# EAGLE board PCB v2 (EAGLE 9.7.0)
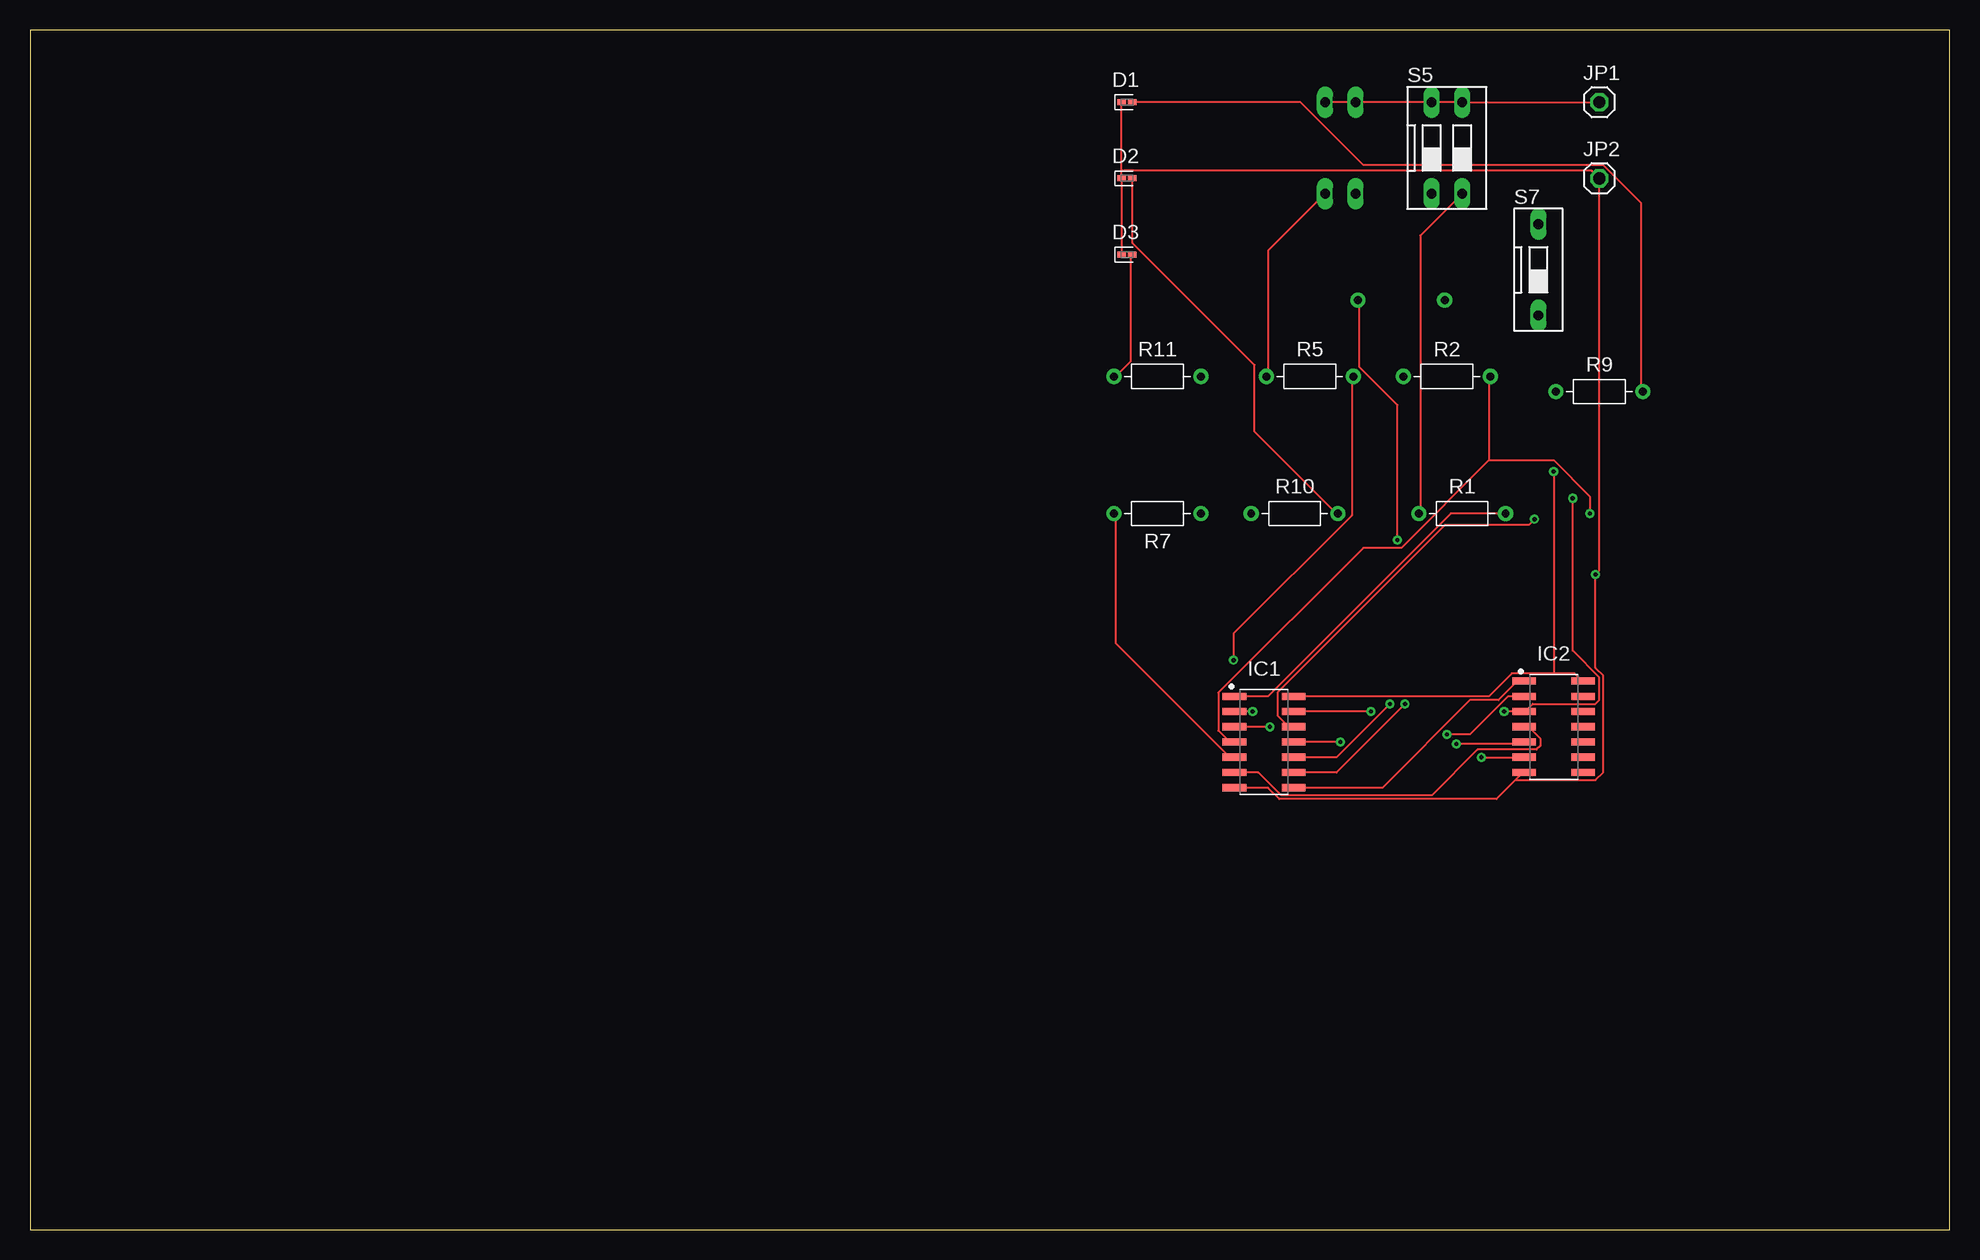
[diagram p0: board, top side]
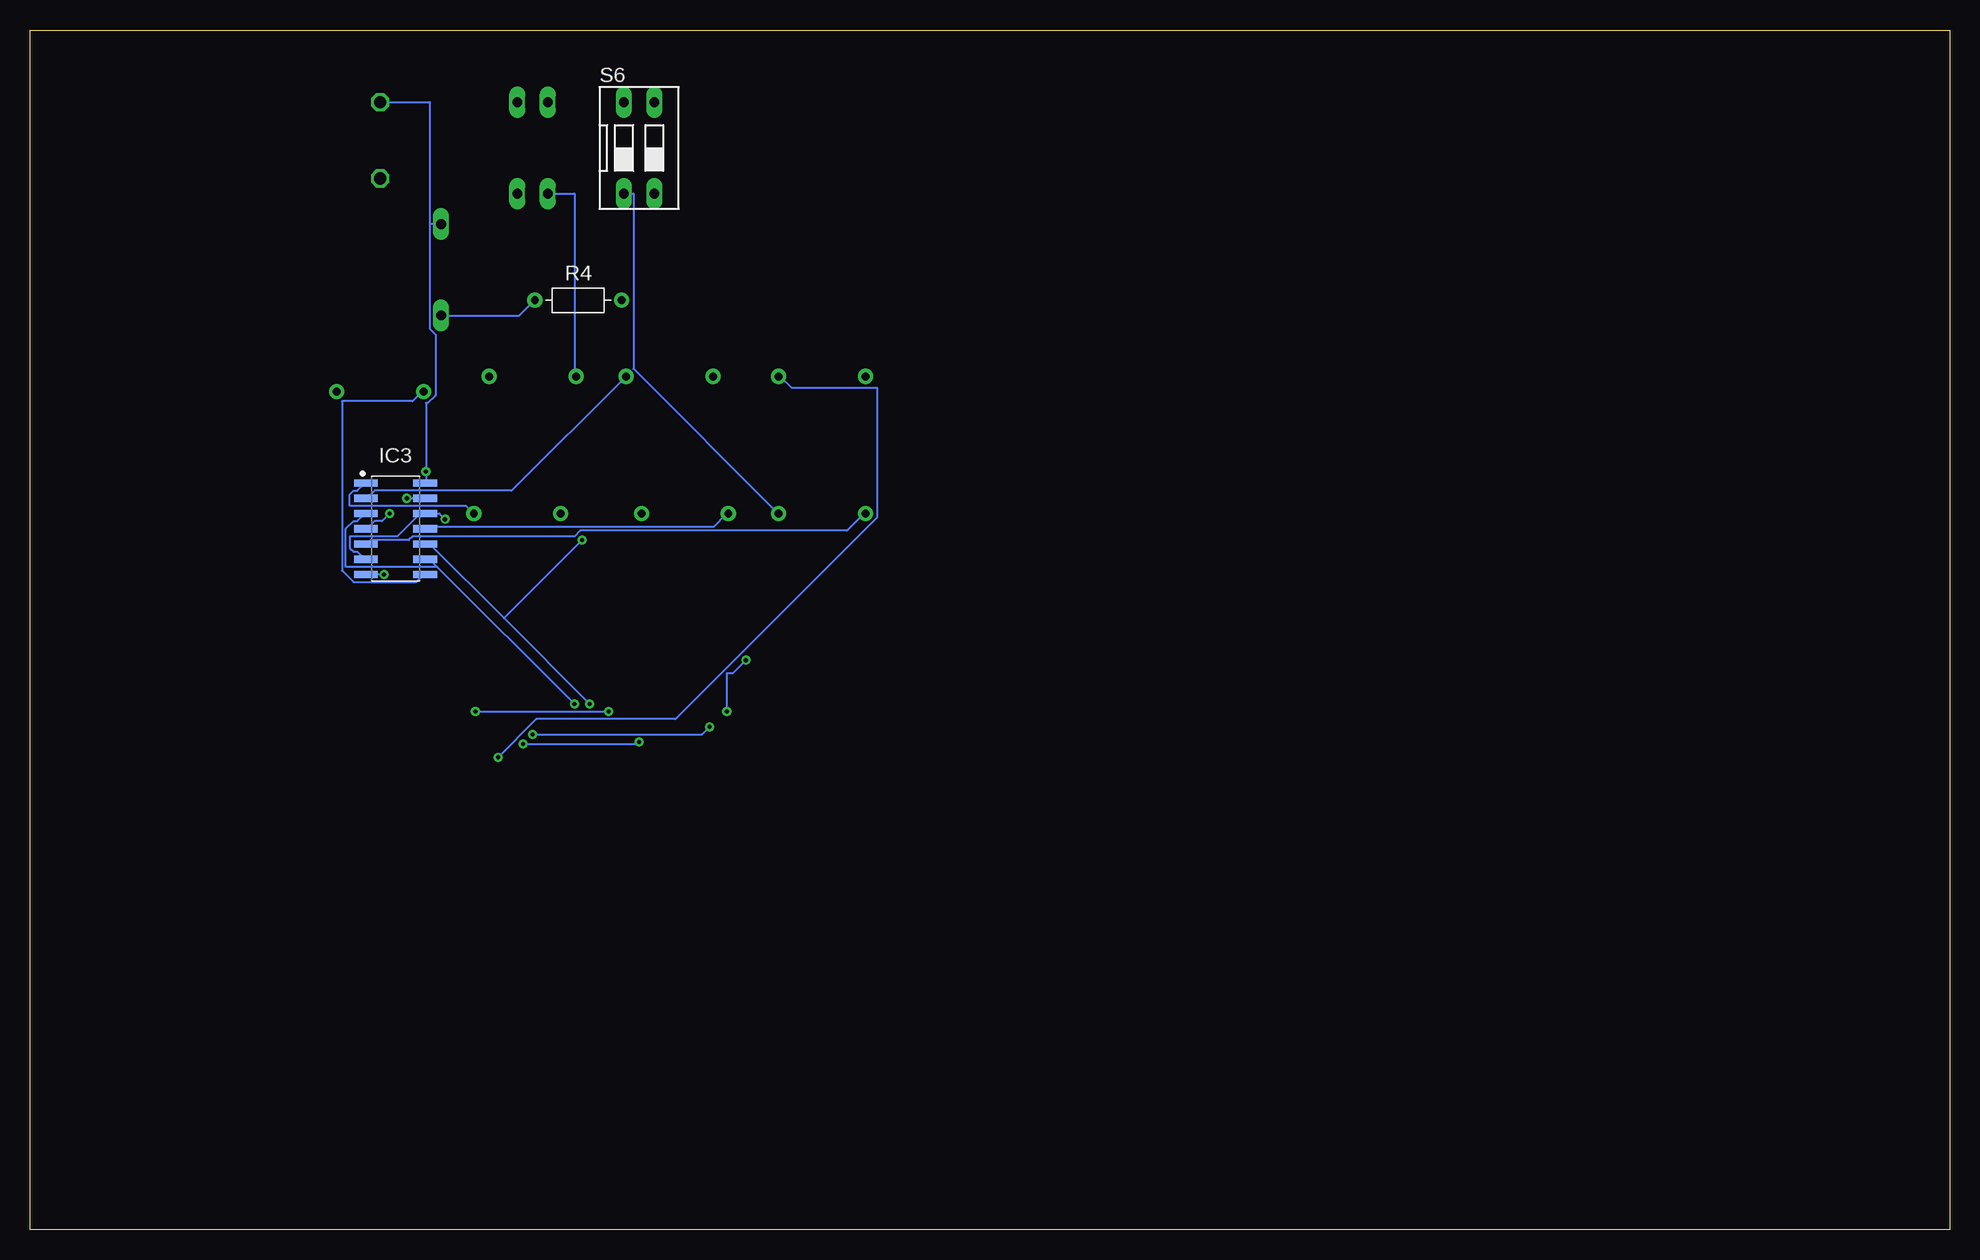
[diagram p1: board, bottom side, seen from below]

Size 160 x 100 mm. Coordinates in mm from the lower left corner, seen from the top.
Outline: 0,0 160,0 160,100 0,100 0,0
Copper layers (1*16): Top / Bottom
Stack-up Default Layer Stack: Top Signal CuFoil:007 0.035mm / Dielectric-1 FR-4 0.2mm / Bottom Signal CuFoil:007 0.035mm
Design rules "default": minimum track width 6mil, minimum drill 0.35mm, track to track 6mil, track to pad 6mil, pad to pad 6mil, via to via 6mil, smd to smd 6mil, copper to edge 40mil, drill to drill 6mil, minimum pad ring 10mil, minimum via ring 8mil, stop-mask expansion 4mil, vias tented up to drill 0mil, thermal gap 10mil

## Footprints (pad centres in the part's own frame; a part is rotated, then mirrored left to right if it is on the bottom)
LEDC1005X25N_FLAT-B = smd 0.7 x 0.5: A 0.45,0; C -0.45,0
SOIC127P600X175-14N = smd 1.968 x 0.599: 1 -2.473,3.81; 2 -2.473,2.54; 3 -2.473,1.27; 4 -2.473,0; 5 -2.473,-1.27; 6 -2.473,-2.54; 7 -2.473,-3.81; 8 2.473,-3.81; 9 2.473,-2.54; 10 2.473,-1.27; 11 2.473,0; 12 2.473,1.27; 13 2.473,2.54; 14 2.473,3.81
1X01 = drill 1.016 octagon: 1 0,0
RESAD724W46L381D178B = drill 0.66 pad 1.26: 1 -3.62,0; 2 3.62,0
DS-02 = drill 0.813 long: 1 -1.27,-3.81; 2 1.27,-3.81; 3 1.27,3.81; 4 -1.27,3.81
DS-01 = drill 0.813 long: 1 0,-3.81; 2 0,3.81

## Placement (x,y rotation side)
D1  LED_BLUE  [LEDC1005X25N_FLAT-B]  91.44,93.98 0 top
D2  LED_BLUE  [LEDC1005X25N_FLAT-B]  91.44,87.63 0 top
D3  LED_BLUE  [LEDC1005X25N_FLAT-B]  91.44,81.28 0 top
IC1  74HC08_SOIC  [SOIC127P600X175-14N]  102.87,40.64 0 top
IC2  74HC32_SOIC  [SOIC127P600X175-14N]  127,41.91 0 top
IC3  74HC86_SOIC  [SOIC127P600X175-14N]  129.54,58.42 0 bottom
JP1  PINHD-1X1  [1X01]  130.81,93.98 0 top
JP2  PINHD-1X1  [1X01]  130.81,87.63 0 top
R1  220  [RESAD724W46L381D178B]  119.38,59.69 0 top
R2  220  [RESAD724W46L381D178B]  118.11,71.12 0 top
R4  220  [RESAD724W46L381D178B]  114.3,77.47 0 bottom
R5  220  [RESAD724W46L381D178B]  106.68,71.12 0 top
R7  220  [RESAD724W46L381D178B]  93.98,59.69 180 top
R9  220  [RESAD724W46L381D178B]  130.81,69.85 0 top
R10  220  [RESAD724W46L381D178B]  105.41,59.69 0 top
R11  220  [RESAD724W46L381D178B]  93.98,71.12 0 top
S5  DS02  [DS-02]  118.11,90.17 0 top
S6  DS02  [DS-02]  109.22,90.17 0 bottom
S7  DS01  [DS-01]  125.73,80.01 0 top

## Library data of the parts
D1-D3 = LED; CATEGORY: LED; COLOR: BLUE; DESCRIPTION: CHIP LED FLAT; SUB-CATEGORY: CHIP; TYPE: FLAT_TOP
IC1 = IC_Logic; CATEGORY: IC_Logic; DESCRIPTION: Quadruple 2-Input AND Gates; MANUFACTURER: Generic; MPN: Generic; SUB-CATEGORY: GATE; TYPE: AND
IC2 = IC_Logic; CATEGORY: IC_Logic; DESCRIPTION: Quadruple 2-Input OR Gates; MANUFACTURER: Generic; MPN: Generic; SUB-CATEGORY: GATE; TYPE: OR
IC3 = IC_Logic; CATEGORY: IC_Logic; DESCRIPTION: Quadruple 2-Input XOR; MANUFACTURER: Generic; MPN: Generic; SUB-CATEGORY: GATE; TYPE: XOR
JP1 JP2 = Connector; CATEGORY: CONNECTOR; SUB-CATEGORY: PIN-HEADER
R1 R2 R4 R5 R7 R9-R11 = Resistor; CATEGORY: Resistor; SUB-CATEGORY: Fixed
S5 S6 = Switch; CATEGORY: SWITCH; MPN: MCNDS02; TYPE: SPST
S7 = Switch; CATEGORY: SWITCH; TYPE: SPST

## Nets
N$1: R1.1 S5.2
N$2: IC1.14 IC2.14 IC3.14 JP1.1 S5.3 S5.4 S6.3 S6.4 S7.2
N$3: R2.1 S5.1
N$4: R4.1 S7.1
N$5: R5.1 S6.2
N$6: R7.1 S6.1
N$7: IC1.1 IC3.1 R1.2
N$8: IC1.2 IC3.2 R5.2
N$9: IC1.4 IC3.4 R2.2
N$10: IC1.5 IC3.5 R7.2
N$11: IC1.10 IC3.10 R4.2
N$12: IC1.9 IC3.3 IC3.9
N$13: IC3.8 R9.1
N$14: IC1.8 IC2.1
N$15: D1.A R9.2
N$16: IC1.3 IC2.2
N$17: IC1.13 IC2.3 IC3.13
N$18: IC1.12 IC3.6 IC3.12
N$19: IC3.11 R10.1
N$20: D2.A R10.2
N$21: IC1.11 IC2.5
N$22: IC1.6 IC2.4
N$24: IC2.6 R11.2
N$25: D3.A R11.1
N$27: D1.C D2.C D3.C IC1.7 IC2.7 IC3.7 JP2.1

## Tracks (layer width: path | path; a pad name or v marks a point on that pad's centre or on a via)
N$1
  Top 0.152: S5.2 115.89,82.87 115.89,59.69 R1.1
N$2  (via drill 0.35)
  Top 0.152: IC1.14 121.6,44.45 123.51,46.35 127,46.35 | 127,46.35 128.75,46.35 129.38,45.72 IC2.14 | S6.3 S6.4 S5.4 S5.3 JP1.1 | v127,63.18 127,46.35
  Bottom 0.152: 126.68,83.82 126.68,75.09 126.21,74.61 126.21,69.53 126.84,68.9 127,68.9 v127,63.18 127,62.23 IC3.14 | S7.2 126.68,83.82 | 126.68,83.82 126.68,93.98 JP1.1
N$3
  Bottom 0.152: S5.1 114.62,86.36 114.62,71.12 R2.1
N$4
  Bottom 0.152: S7.1 119.22,76.2 117.95,77.47 R4.1
N$5
  Top 0.152: S6.2 103.19,81.6 103.19,71.12 R5.1
N$6
  Bottom 0.152: S6.1 109.7,86.36 109.7,71.75 97.63,59.69 R7.1
N$7
  Top 0.152: IC1.1 103.19,44.45 118.43,59.69 R1.2
  Bottom 0.152: IC3.1 132.08,62.23 132.72,61.59 133.03,61.59 133.35,61.28 133.35,60.33 123.67,60.33 123.03,59.69 R1.2
N$8  (via drill 0.35)
  Top 0.152: v101.92,43.18 IC1.2 | v100.33,47.47 100.33,49.69 110.17,59.53 110.17,71.12 R5.2
  Bottom 0.152: v101.92,43.18 101.92,46.35 101.44,46.35 v100.33,47.47 | IC3.2 131.92,60.96 131.29,61.59 119.86,61.59 110.33,71.12 R5.2
N$9  (via drill 0.35)
  Top 0.152: IC1.4 100.01,40.64 99.06,41.59 99.06,44.77 111.12,56.83 114.3,56.83 121.6,64.14 | 121.6,64.14 121.6,71.12 R2.2 | v130.02,59.69 130.02,61.12 127,64.14 121.6,64.14
  Bottom 0.152: v130.02,59.69 130.65,59.05 131.29,59.05 131.92,58.42 IC3.4
N$10
  Top 0.152: IC1.5 100.01,39.37 90.49,48.9 90.49,59.69 R7.2
  Bottom 0.152: IC3.5 131.92,57.15 131.6,57.47 128.43,57.47 128.11,57.78 114.62,57.78 114.14,58.26 91.92,58.26 90.49,59.69 R7.2
N$11  (via drill 0.35)
  Top 0.152: IC1.10 108.9,39.37 v113.35,43.81 | v113.98,57.47 113.98,68.74 110.81,71.91 110.81,77.47 R4.2
  Bottom 0.152: 120.49,50.96 126.68,57.15 IC3.10 | 120.49,50.96 v113.35,43.81 | 120.49,50.96 v113.98,57.47
N$12  (via drill 0.35)
  Top 0.152: IC1.9 108.9,38.1 v114.62,43.81
  Bottom 0.152: 126.05,55.24 126.68,55.88 IC3.9 | 126.05,55.24 v114.62,43.81 | 126.05,55.24 133.67,55.24 133.67,58.42 133.03,59.05 132.72,59.05 132.08,59.69 IC3.3
N$13
  Bottom 0.152: IC3.8 127.16,54.61 127.79,53.98 133.03,53.98 133.99,54.93 133.99,69.06 128.11,69.06 127.32,69.85 R9.1
N$14
  Top 0.152: IC1.8 112.71,36.83 120.02,44.13 122.4,44.13 123.98,45.72 IC2.1
N$15
  Top 0.152: D1.A 105.89,93.98 111.12,88.74 131.13,88.74 134.3,85.57 134.3,69.85 R9.2
N$16  (via drill 0.35)
  Top 0.152: v103.35,41.91 IC1.3 | v118.11,41.27 120.02,41.27 123.19,44.45 IC2.2
  Bottom 0.152: v103.35,41.91 103.98,41.27 v118.11,41.27
N$17  (via drill 0.35)
  Top 0.152: v111.76,43.18 IC1.13 | v122.87,43.18 IC2.3 124.62,43.18 125.25,43.81 130.49,43.81 130.81,44.13 130.81,46.04 128.59,48.26 v128.59,60.96
  Bottom 0.152: v122.87,43.18 v111.76,43.18 | v128.59,60.96 IC3.13
N$18  (via drill 0.35)
  Top 0.152: IC1.12 104.93,41.91 103.98,42.86 103.98,44.77 117.95,58.74 124.94,58.74 v125.41,59.21
  Bottom 0.152: v125.41,59.21 125.89,59.69 IC3.12 127.48,59.69 129.38,57.78 133.35,57.78 133.35,56.83 133.03,56.52 132.72,56.52 132.08,55.88 IC3.6
N$19
  Bottom 0.152: IC3.11 127,58.42 126.84,58.58 103.03,58.58 101.92,59.69 R10.1
N$20
  Top 0.152: D2.A 91.92,87.63 91.92,82.23 102.08,72.07 102.08,66.52 108.9,59.69 R10.2
N$21  (via drill 0.35)
  Top 0.152: v109.22,40.64 IC1.11 | v118.9,40.48 124.3,40.48 124.46,40.64 IC2.5
  Bottom 0.152: v109.22,40.64 109.38,40.48 v118.9,40.48
N$22
  Top 0.152: IC1.6 102.39,38.1 104.3,36.2 116.84,36.2 120.65,40.01 125.57,40.01 125.89,40.32 125.89,40.96 124.94,41.91 IC2.4
N$24  (via drill 0.35)
  Top 0.152: v120.97,39.37 IC2.6
  Bottom 0.152: v120.97,39.37 117.79,42.55 106.2,42.55 89.38,59.37 89.38,70.17 96.52,70.17 97.47,71.12 R11.2
N$25
  Top 0.152: D3.A 91.76,81.28 91.76,72.39 90.49,71.12 R11.1
N$27  (via drill 0.35)
  Top 0.152: 90.96,87.63 90.96,81.28 D3.C | 90.96,87.63 90.96,88.27 | 90.96,88.27 90.96,93.98 D1.C | 90.96,87.63 D2.C | IC1.7 103.19,36.83 104.14,35.88 122.24,35.88 123.83,37.47 | 123.83,37.47 124.46,38.1 IC2.7 | 123.83,37.47 130.49,37.47 131.13,38.1 131.13,46.2 130.49,46.83 v130.49,54.61 130.81,54.93 JP2.1 130.18,88.27 90.96,88.27
  Bottom 0.152: v130.49,54.61 IC3.7